# Altium PCB sitara_rev3b.PcbDoc (part 1 of 3)
Units mil, origin at the board's own origin, x right, y up, seen from the top; angles counter-clockwise.
Board outline 1650 x 2400 mil, 4 copper layers (Top Layer, Internal Plane 1, Internal Plane 2, Bottom Layer), stack 60.8 mil thick; 109 components, 83 nets, 387 pads, 306 vias.
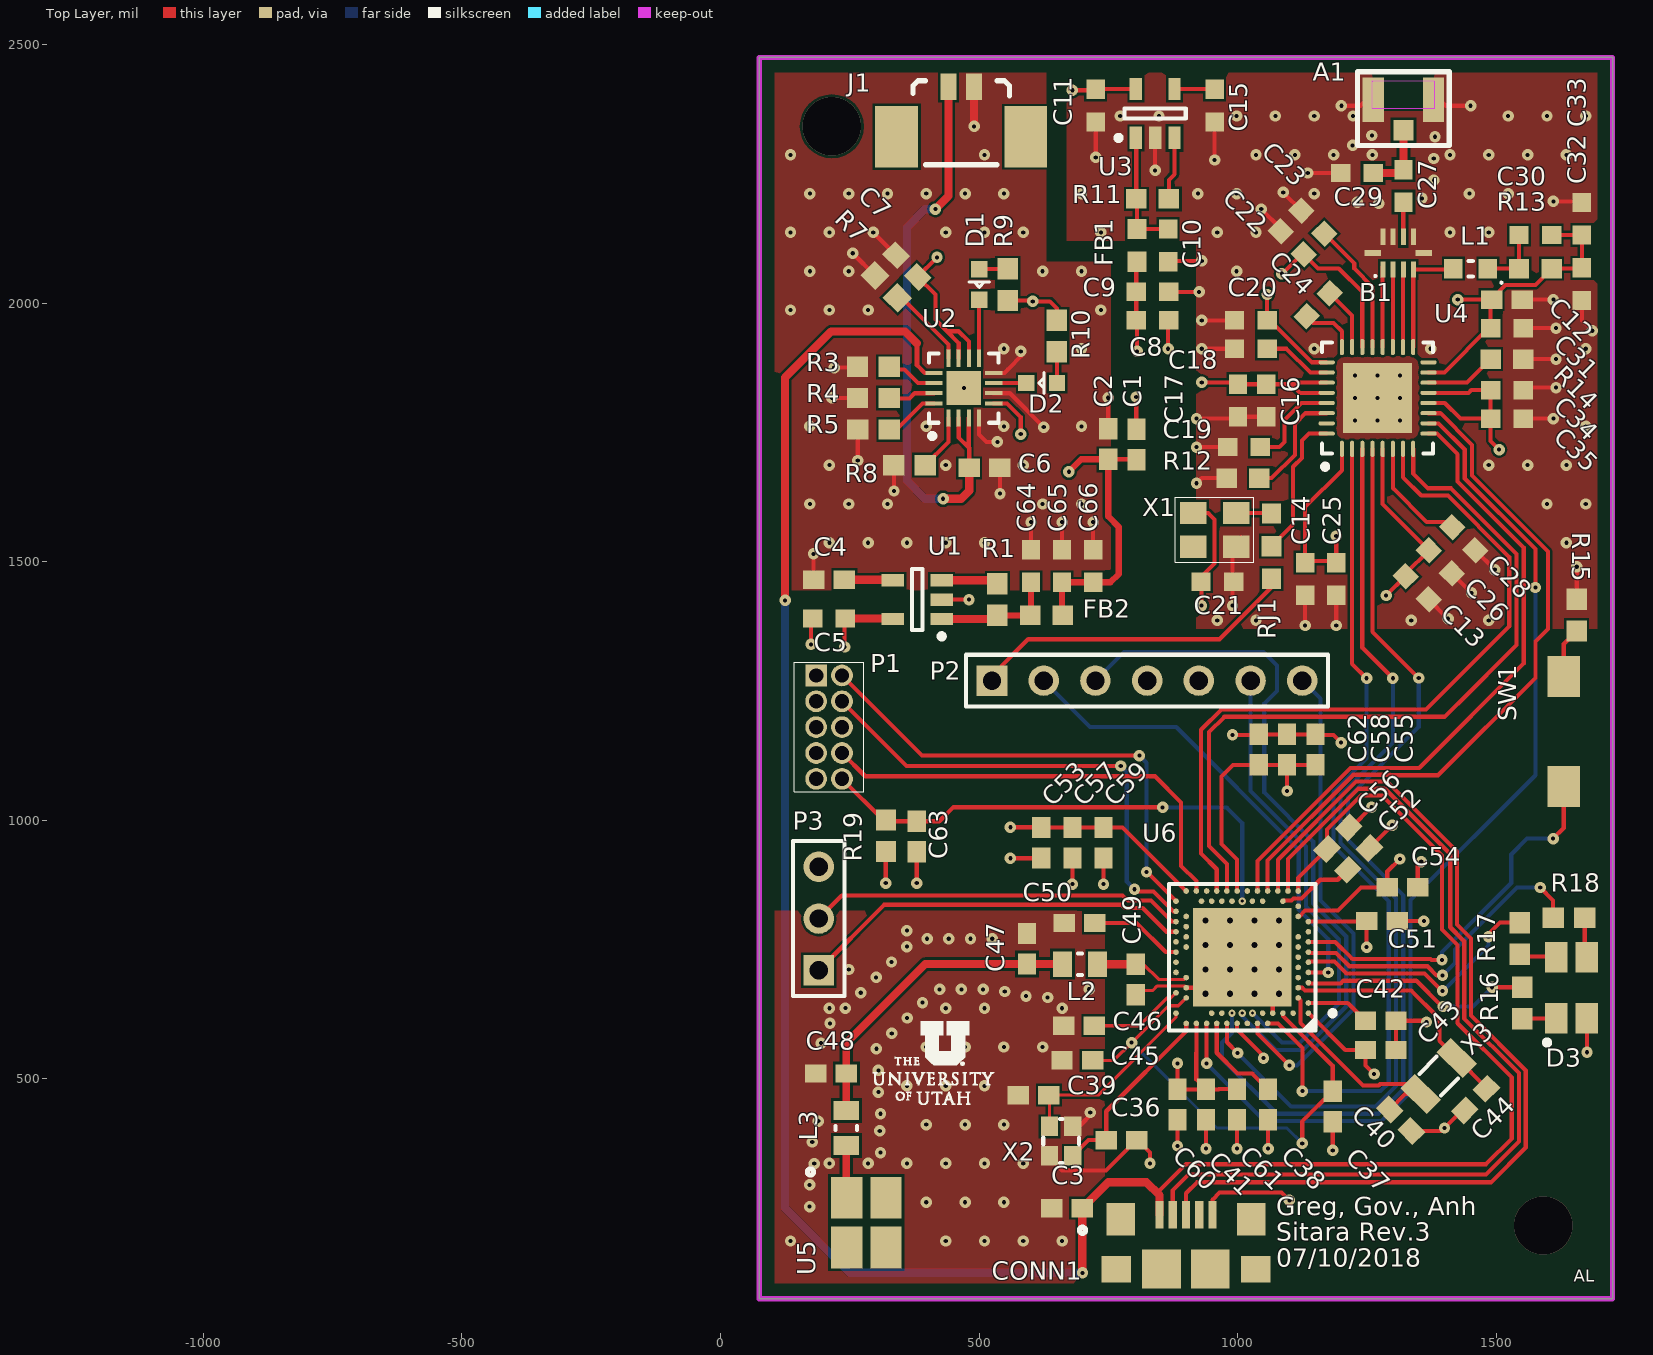
[diagram p0: Top Layer view]
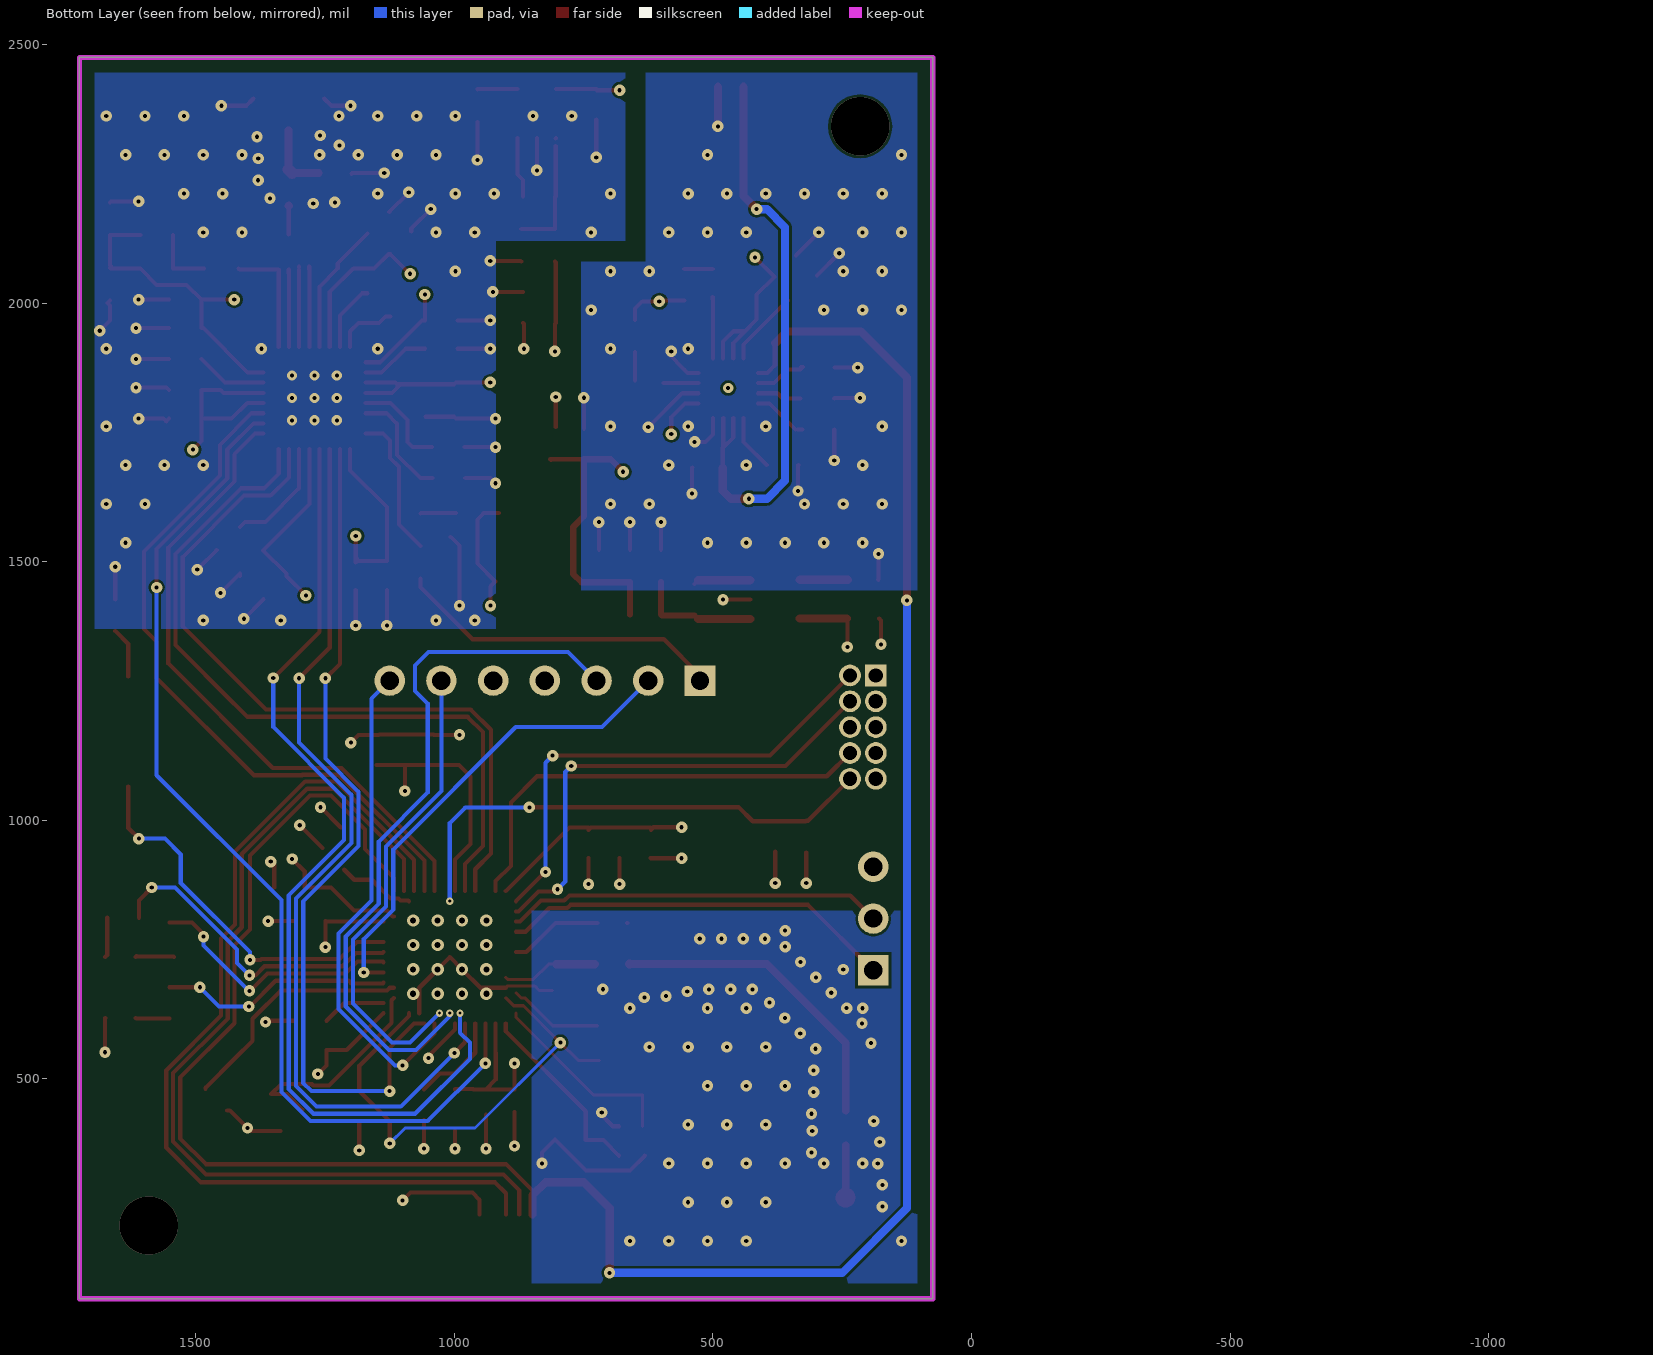
[diagram p1: Bottom Layer view, seen from below]
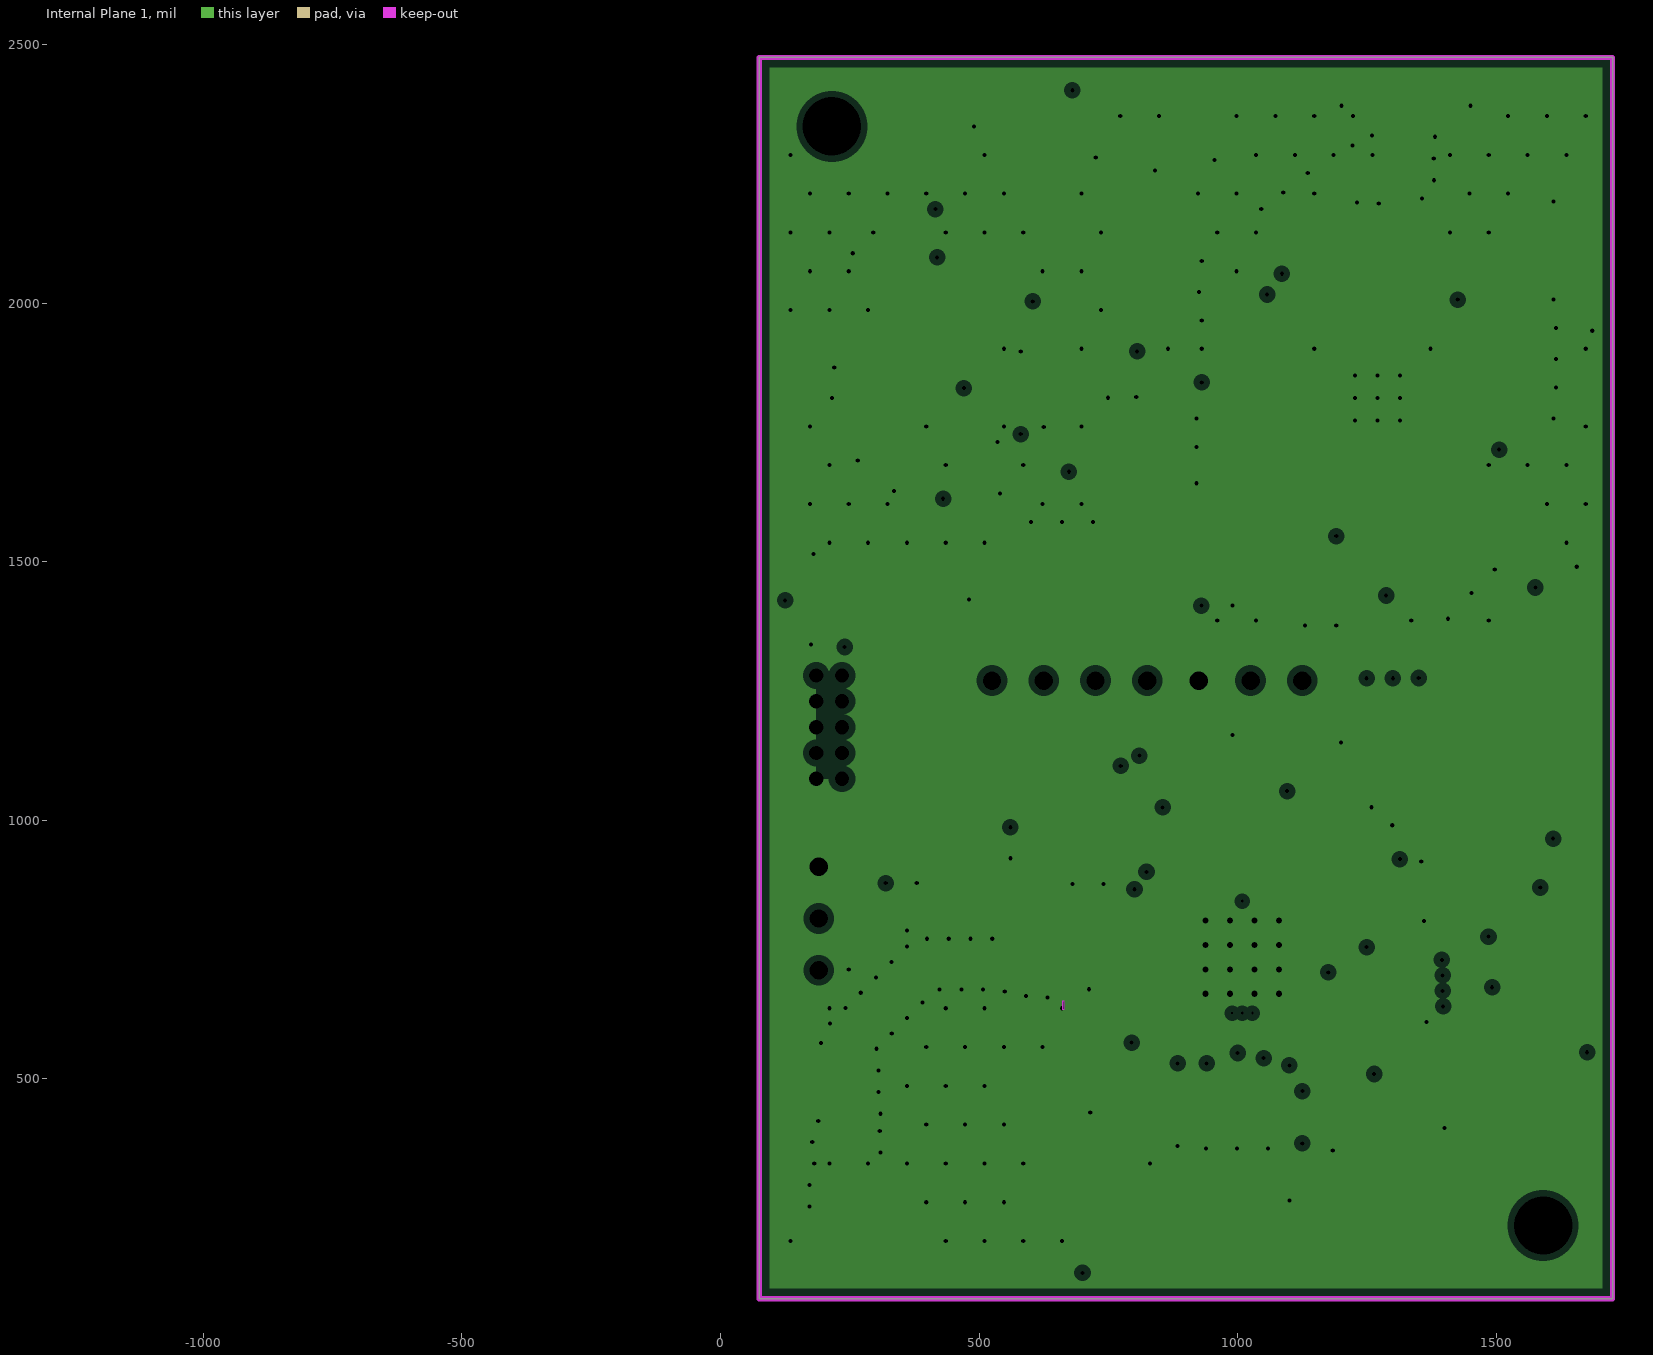
[diagram p2: Internal Plane 1, clearances drawn from the general rule]
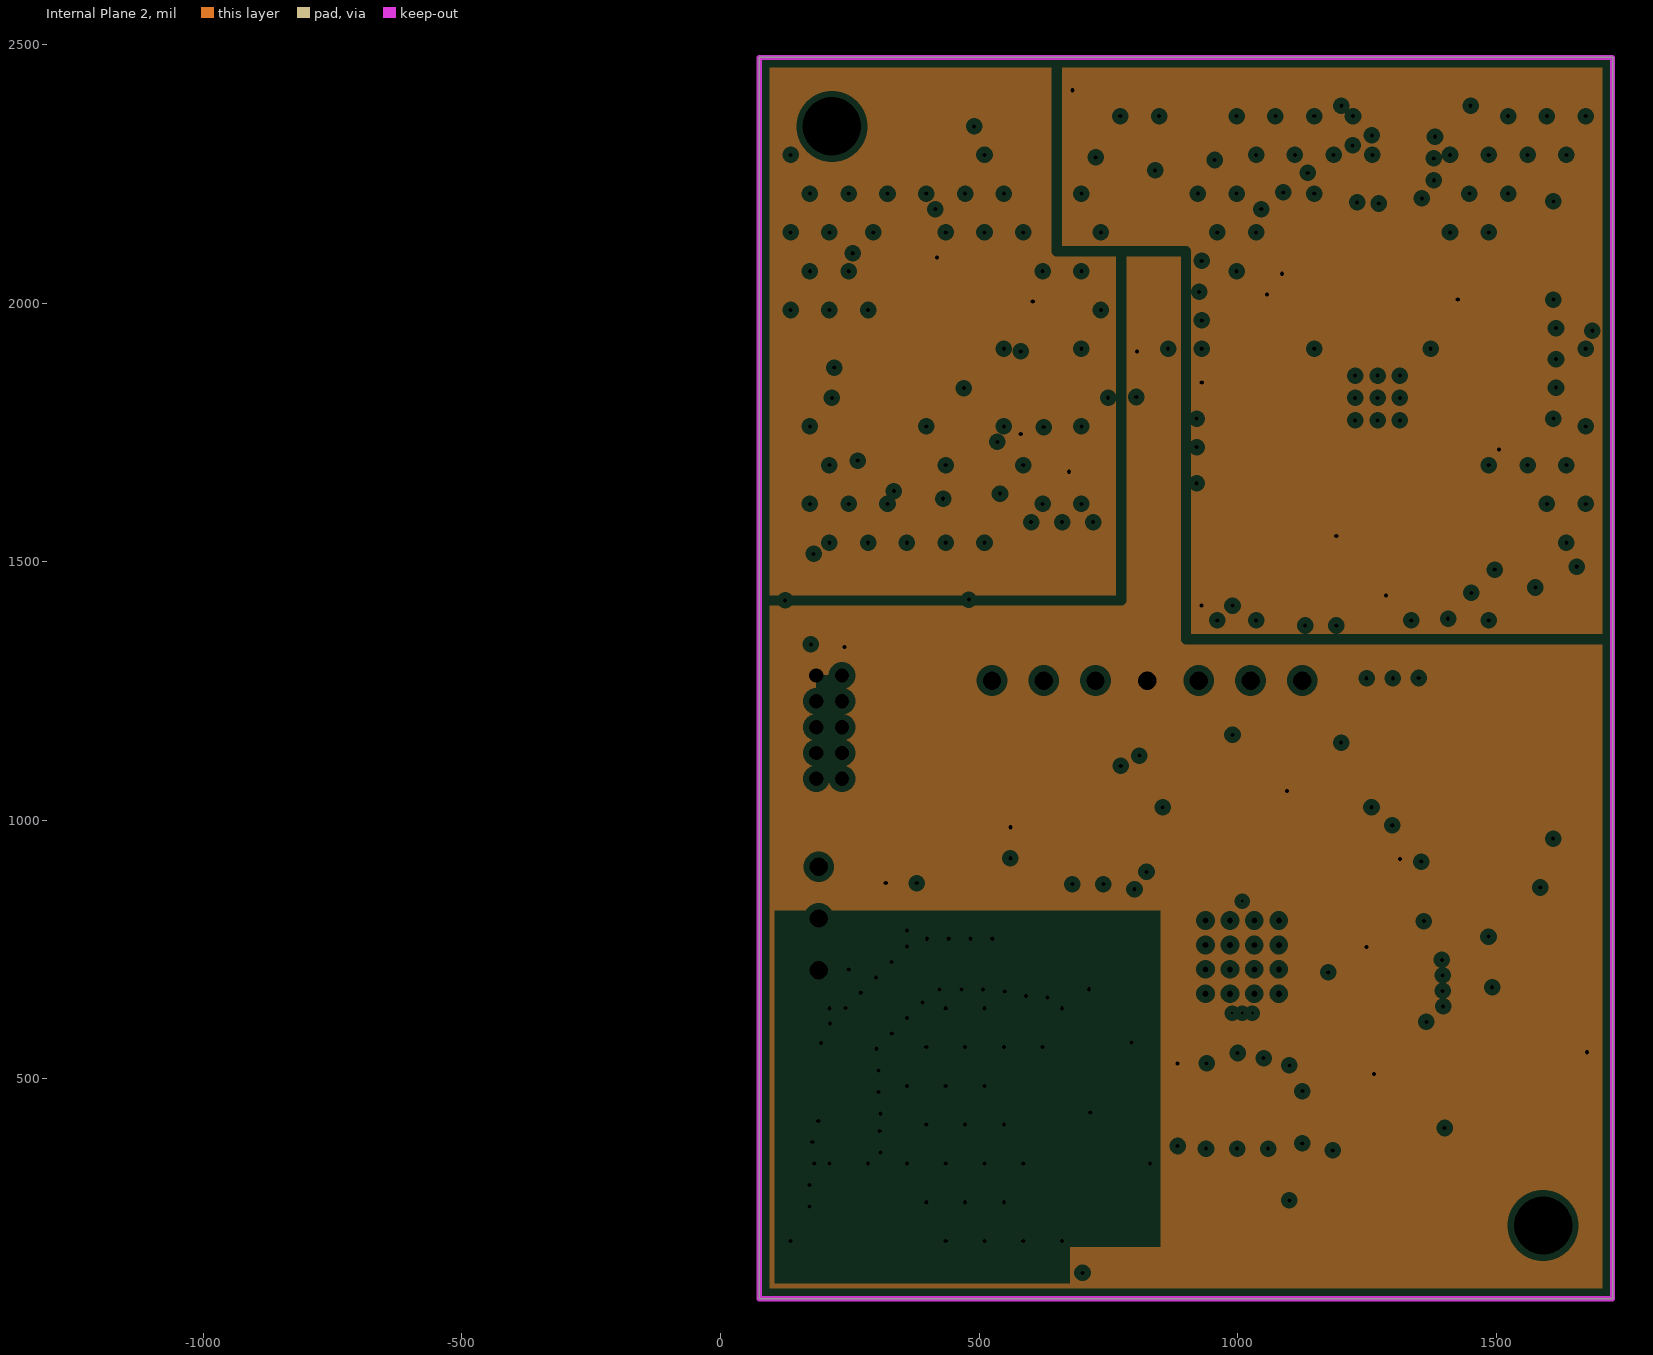
[diagram p3: Internal Plane 2, clearances drawn from the general rule]

## Layer stack, top to bottom
Top Solder: solder mask 0.6, Solder Resist, Dk 3.5
Top Layer: signal copper 1.4
Dielectric1: prepreg 9.1, ML 4, Dk 4.2
Internal Plane 1: plane copper 1.4, net GND
Dielectric2: prepreg 37, ML 4, Dk 4.2
Internal Plane 2: plane copper 1.4, net (Multiple Nets)
Dielectric3: prepreg 9.1, ML 4, Dk 4.2
Bottom Layer: signal copper 1.4
Bottom Solder: solder mask 0.6, Solder Resist, Dk 3.5

## Board outline
75,75 75,2475 1725,2475 1725,75

## Design rules (kind name [scope] priority, off if disabled: settings)
Clearance "Clearance~Sunstone Circuits" [All] p1: gap=5 ignorepadtopadclearanceinfootprint=FALSE except(0: Arc-Hole Track-Hole SMDPad-Hole THPad-Hole Via-Hole Fill-Hole Poly-Hole Region-Hole Text-Hole) // Sunstone Circuits Minimum Clearance Rule (MLB~4&6 Layer Designs)
Clearance [All] p2: gap=5 ignorepadtopadclearanceinfootprint=FALSE except(0: Arc-Hole Track-Hole SMDPad-Hole THPad-Hole Via-Hole Fill-Hole Poly-Hole Region-Hole Text-Hole)
HoleSize "HoleSize~Sunstone Circuits" [All] p1: absolutevalues=TRUE maxlimit=251 minlimit=8 maxpercent=80.000 minpercent=20.000 // Sunstone Circuits Hole Size Rule (MLB~4&6 Layer Designs)
HoleSize Testpoint [All] p2: absolutevalues=TRUE maxlimit=100 minlimit=1 maxpercent=80.000 minpercent=20.000
HoleSize TestPointUsage [All] p3: absolutevalues=TRUE maxlimit=100 minlimit=1 maxpercent=80.000 minpercent=20.000
HoleSize [All] p4: absolutevalues=TRUE maxlimit=100 minlimit=1 maxpercent=80.000 minpercent=20.000
MinimumAnnularRing "MinimumAnnularRing~Sunstone Circuits" [All] p1: minimumring=7 // Sunstone Circuits Minimum Annular Ring (MLB~4&6 Layer Designs)
PlaneClearance "PlaneClearance~Sunstone Circuits" [All] p1: clearance=12 // Sunstone Circuits Power Plane Clearance Rule (MLB~4&6 Layer Designs)
PlaneClearance [All] p2: clearance=20
PlaneConnect [All] p1: planeconnectstyle=Direct reliefexpansion=20 reliefentries=4 reliefconductorwidth=10 reliefairgap=10
PlaneConnect "PlaneConnect~Sunstone Circuits" [All] p2: planeconnectstyle=Relief reliefexpansion=10 reliefentries=4 reliefconductorwidth=8 reliefairgap=10 // Sunstone Circuits Power Plane Connect Rule (MLB~4&6 Layer Designs)
PolygonConnect Stitch [IsPolygon vs InNet('GND')] p1: connectstyle=Direct reliefconductorwidth=10 reliefentries=4 polygonreliefangle="90 Angle" airgapwidth=10
PolygonConnect "PolygonConnect~Sunstone Circuits" [All] p2: connectstyle=Relief reliefconductorwidth=8 reliefentries=4 polygonreliefangle="90 Angle" airgapwidth=10 // Sunstone Circuits Polygon Connect Style (MLB~4&6 Layer Designs)
PolygonConnect [All] p3: connectstyle=Relief reliefconductorwidth=10 reliefentries=4 polygonreliefangle="90 Angle" airgapwidth=10
RoutingVias "RoutingVias~Sunstone Circuits" [All] p1: holewidth=8 width=22 viastyle="Through Hole" minholewidth=8 minwidth=22 maxholewidth=20 maxwidth=40 // Sunstone Circuits Routing Vias Rule (MLB~4&6 Layer Designs)
RoutingVias [All] p2: holewidth=12 width=24 viastyle="Through Hole" minholewidth=5.91 minwidth=13.78 maxholewidth=12 maxwidth=24
ShortCircuit "ShortCircuit~Sunstone Circuits" [All] p1: allowed=FALSE // Sunstone Circuits Short Circuit Rule~Do Not Allow (MLB~4&6 Layer Designs)
ShortCircuit [All] p2: allowed=FALSE
SolderMaskExpansion "SolderMaskExpansion~Sunstone Circuits" [All] p1: expansion=3 // Sunstone Circuits Solder Mask Expansion Rule (MLB~4&6 Layer Designs)
SolderMaskExpansion [All] p2: expansion=4
ViasUnderSMD "ViasUnderSMD~Sunstone Circuits" [All] p1: allowed=FALSE // Sunstone Circuits Vias Under SMD~Do Not Allow (MLB~4&6 Layer Designs)
Width Antenna [InNetClass('RF')] p1: maxlimit=13.19 minlimit=13.19 preferedwidth=13.19 impedancedriven=TRUE minimp=50.000000 maximp=50.000000 favimp=50.000000
Width "Width~Sunstone Circuits" [All] p2: maxlimit=100 minlimit=6 preferedwidth=10 // Sunstone Circuits Minimum Width Rule (MLB~4&6 Layer Designs)
Width [All] p3: maxlimit=40 minlimit=4 preferedwidth=16 bottomlayer_minwidth=6 minimp=50.000000 maximp=50.000000 favimp=50.000000
26 further rules are at their usual default settings.

## Classes and differential pairs
component class U_BLE_USB_nRF52840: C36 C37 C38 C39 C40 C41 C42 C43 C44 C45 C46 C47 C48 C49 C50 C51 C52 C53 C54 C55 C56 C57 C58 C59 C60 C61 C62 C63 D3 L2 L3 P1 P3 R15 R16 R17 R18 R19 SW1 U5 U6 X2 X3
component class U_Power_System: C1 C2 C3 C4 C5 C6 C7 C64 C65 C66 CONN1 D1 D2 FB2 J1 R1 R3 R4 R5 R7 R8 R9 R10 U1 U2
component class U_RF: A1 B1 C8 C9 C10 C11 C12 C13 C14 C15 C16 C17 C18 C19 C20 C21 C22 C23 C24 C25 C26 C27 C28 C29 C30 C31 C32 C33 C34 C35 FB1 L1 P2 R11 R12 R13 R14 RJ1 U3 U4 X1
net class RF: NetA1_1 NetC47_2 NetL3_2

## Components (designator, comment, footprint, x,y, rotation, side; value= is the part's Value field where it differs from the comment)
A1 "U.FL-R-SMT(01)" U.FL-R-SMT-1 1320.5,2392.88 r0 top
B1 "0900PC15J0013" 0900PC15J0013 1310.5,2096.5 r90 top
C1 "4.7uF" 0603_Cap 804.39,1726.75 r270 top
C2 "0.1uF" 0603_Cap 749.64,1727.36 r270 top
C3 "1uF" 0603_Cap 670,250 r0 top
C4 "10uF" 0603_Cap 210,1465 r0 top
C5 "GRM188R61A105KA61D" "CAPC1608X08N (0603)" 210,1390 r0 top
C6 "4.7uF" 0603_Cap 510.5,1681.5 r180 top
C7 "4.7uF" 0603_Cap 360.5,2071.5 r315 top
C8 "GRM188R60J106ME47D" "CAPC1608X08N (0603)" 835.5,1966.5 r180 top
C9 "GRM188R61A105KA61D" "CAPC1608X08N (0603)" 835.5,2021.5 r180 top
C10 "GRM188F51A225ZE01D" "CAPC1608X08N (0603)" 865.5,2111.5 r90 top
C11 "GRM188R61A105KA61D" "CAPC1608X08N (0603)" 725.5,2381.5 r90 top
C12 "0.1uF" 0603_Cap 1520.5,2006.5 r180 top
C13 "GRM188R61A105KA61D" "CAPC1608X08N (0603)" 1346.97,1449.5 r135 top
C14 "GRM188R60J106ME47D" "CAPC1608X08N (0603)" 1130.5,1466.5 r90 top
C15 "GRM1885C1H102JA01D" "CAPC1608X08N (0603)" 955.5,2381.5 r90 top
C16 "GCM188R71H473KA55D" "CAPC1608X08N (0603)" 1055.5,1811.5 r270 top
C17 "GCM188R71H473KA55D" "CAPC1608X08N (0603)" 1000.5,1811.5 r270 top
C18 "GCM188R71H473KA55D" "CAPC1608X08N (0603)" 1025.5,1911.5 r0 top
C19 "GCM188R71H473KA55D" "CAPC1608X08N (0603)" 1012,1721.5 r180 top
C20 "GCM188R71H473KA55D" "CAPC1608X08N (0603)" 1025.5,1966.5 r0 top
C21 "GRM188R71H103MA01D" "CAPC1608X08N (0603)" 960.7,1461.3 r180 top
C22 "GCM188R71H473KA55D" "CAPC1608X08N (0603)" 1105.5,2116.5 r315 top
C23 "GRM188R71H103MA01D" "CAPC1608X08N (0603)" 1145.5,2156.5 r135 top
C24 "GRM1885C1H152JA01D" "CAPC1608X08N (0603)" 1155.5,1996.5 r225 top
C25 "GCM188R71H473KA55D" "CAPC1608X08N (0603)" 1190.5,1466.5 r90 top
C26 "GCM188R71H473KA55D" "CAPC1608X08N (0603)" 1391.97,1499.5 r135 top
C27 "C_TBD" "CAPC1608X08N (0603)" 1320.5,2226.5 r90 top value=DNP
C28 "GRM188R71E224KA88D" "CAPC1608X08N (0603)" 1436.97,1544.5 r135 top
C29 "C_TBD" "CAPC1608X08N (0603)" 1230.5,2251.5 r0 top value=DNP
C30 "GRM1885C1H330JA01D" "CAPC1608X08N (0603)" 1575.5,2131.5 r180 top value=33pF
C31 "GCM188R71H473KA55D" "CAPC1608X08N (0603)" 1520.5,1951.5 r0 top
C32 "GRM188R71H103MA01D" "CAPC1608X08N (0603)" 1665.5,2036.5 r90 top
C33 "GQM1885C1H101JB01D" "CAPC1608X08N (0603)" 1665.5,2163 r270 top
C34 "GCM188R71H473KA55D" "CAPC1608X08N (0603)" 1520.5,1831.5 r0 top
C35 "GCM188R71H473KA55D" "CAPC1608X08N (0603)" 1520.5,1776.5 r0 top
C36 "12pF" 0603_Cap 775.5,381.5 r0 top
C37 "1uF" 0603_Cap 1183.77,446.74 r90 top
C38 "0.1uF" 0603_Cap 1058.77,450.24 r270 top
C39 "12pF" 0603_Cap 605.5,468.59 r180 top
C40 "12pF" 0603_Cap 1315,420 r135 top
C41 "0.1uF" 0603_Cap 938.77,450.24 r90 top
C42 "0.1uF" 0603_Cap 1276.7,612.31 r180 top
C43 "1uF" 0603_Cap 1276.7,555.74 r180 top
C44 "12pF" 0603_Cap 1460,460 r45 top
C45 "100pF" 0603_Cap 690,535.69 r180 top
C46 "0.1uF" 0603_Cap 693.28,602.78 r0 top
C47 "0.5pF" 0603_Cap 592.65,751.5 r270 top
C48 "1.3pF" 0603_Cap 213.78,510.44 r0 top
C49 "0.8pF" 0603_Cap 803.1,692.3 r90 top
C50 "0.1uF" 0603_Cap 694.23,801.5 r180 top
C51 "4.7uF" 0603_Cap 1278.77,805.24 r180 top
C52 "4.7uF" 0603_Cap 1233.77,925.24 r225 top
C53 "0.1uF" 0603_Cap 620.5,956.5 r90 top
C54 "0.1uF" 0603_Cap 1318.77,870.24 r180 top
C55 "1uF" 0603_Cap 1150.5,1136.5 r270 top
C56 "4.7uF" 0603_Cap 1193.77,965.24 r225 top
C57 "10uF" 0603_Cap 680.5,956.5 r90 top
C58 "10uF" 0603_Cap 1095.5,1136.5 r270 top
C59 "1uF" 0603_Cap 740.5,956.5 r90 top
C60 "1uF" 0603_Cap 883.77,450.24 r90 top
C61 "0.1uF" 0603_Cap 998.77,450.24 r90 top
C62 "0.1uF" 0603_Cap 1040.5,1136.5 r270 top
C63 "0.1uF" 0603_Cap 379.5,968.5 r90 top
C64 "GRM188F51A225ZE01D" "CAPC1608X08N (0603)" 600.5,1491.5 r270 top
C65 "GRM188R60J106ME47D" "CAPC1608X08N (0603)" 660.5,1491.5 r270 top
C66 "GRM188R61A105KA61D" "CAPC1608X08N (0603)" 720.5,1491.5 r270 top
CONN1 "10118193-0001LF" USB_MICRO_B 900,185 r0 top
D1 "LTST-C191KFKT" 0603_LED 500.5,2065.48 r270 top
D2 "LTST-C191KFKT" 0603_LED 650.5,1845.48 r180 top
D3 "CLV1A-FKB-CJ1M1F1BB7R4S3" "CREE LV1" 1645.5,676.5 r90 top
FB1 "BLM18BD221SN1D" "RESC1608X06N (0603)" 805.5,2111.5 r90 top
FB2 "BLM18BD221SN1D" "RESC1608X06N (0603)" 630.5,1396.5 r180 top
J1 "0533980271" 53398-0271 465.5,2321.5 r0 top
L1 "LQG18HN10NJ00D" INDC1608X08N 1450.5,2066.5 r180 top value=10nH
L2 "3.3nH" 0603_IND 695.18,721.83 r180 top
L3 "1.8nH" 0603_IND 243.38,405 r270 top
P1 "M50-3500542" M50 210,1180 r270 top
P2 "Header 7" HDR1X7 525,1270 r0 top
P3 "Header 3" HDR1X3 190,710 r90 top
R1 "10K" 0603_RES 535.5,1426.5 r270 top
R3 "56.2K" 0603_RES 295.5,1876.5 r0 top
R4 "3.57K" 0603_RES 295.5,1816.5 r0 top
R5 "4.32K" 0603_RES 296.01,1755.48 r0 top
R7 "2.94K" 0603_RES 320.5,2031.5 r135 top
R8 "10K" 0603_RES 365.5,1686.5 r0 top
R9 "1.5K" 0603_RES 555.5,2035.48 r270 top
R10 "1.5K" 0603_RES 650.5,1936.5 r90 top
R11 "RC0603FR-0710KL" "RESC1608X06N (0603)" 835.5,2201.5 r180 top
R12 "MCR03ERTJ000" "RESC1608X06N (0603)" 1010.5,1661.5 r0 top
R13 "RC0603FR-0710RL" "RESC1608X06N (0603)" 1575.5,2066.5 r180 top value="10 ohm"
R14 "MCR03ERTJ563" "RESC1608X06N (0603)" 1520.5,1891.5 r180 top
R15 "3.57K" 0603_RES 1655.5,1396.5 r270 top
R16 "330" 0603_RES 1550.5,646.5 r270 top
R17 "330" 0603_RES 1545.5,771.5 r90 top
R18 "330" 0603_RES 1640.5,811.5 r180 top
R19 "10K" 0603_RES 320,970 r90 top
RJ1 "R_J" RJ 1065.5,1530 r90 top value=DNP
SW1 "EVQ-PE105K" EVQ-PE105K 1630.5,1171.5 r270 top
U1 "TPS2147IDGQG4" SOT95P280X145-5N 380.5,1426.5 r180 top
U2 "BQ24232HARGTT" QFN_16_BQ24232 470.5,1835.48 r90 top
U3 "FAN2500S30X" SOT95P280X145-5N 840.5,2366.5 r90 top
U4 "CC1200RHBR" S-PVQFN-N32 1270.5,1816.5 r90 top
U5 "2.4GHz" ANT_molex_2_4_GHz 244.02,270 r0 top
U6 "nRF52840-QIAA" AQFN50P700X700X85_HS-74N 1008.77,735.24 r180 top
X1 "ASE-40.000MHZ-L-C-T" 3.2x2.5x1.2mmXTAL 955.5,1561.5 r0 top
X2 "32MHz" BT-XTAL_2016 658.77,379.79 r270 top
X3 "32.768kHz" XTAL_3215 1388.77,505.24 r45 top

## Footprints (in the part's own frame and the unit in brackets; to place one, negate y for a bottom-side part, rotate by r counter-clockwise, add the part's x,y. Pads: shape width x height; smd on the part's side, far side on the other; paste and mask are expansions set on the pad)
3.2x2.5x1.2mmXTAL [mm]
  rect 1.3x1.1 smd: 1(-1.05,-0.825) 2(1.05,-0.825) 3(1.05,0.825) 4(-1.05,0.825)
  round 0.5 on Top Overlay: 5(-2.25,-1.25)
  silkscreen extent -1.92,-1.6 1.92,1.6, body extent -1.6,-1.25 1.6,1.25, height 0.91
0603_Cap [mm] "Chip Capacitor, 2-Leads, Body 1.60x0.80mm, IPC Medium Density"
  rect 1.05x0.9 smd: 1(-0.75,0) 2(0.75,0)
  body extent -0.85,-0.45 0.85,0.45, height 0.9
0603_IND [mm] "Chip Inductor, 2-Leads, Body 1.60x1.05mm, IPC Medium Density"
  rect 0.93x1.25 smd: 1(-0.86,0) 2(0.86,0)
  silkscreen extent -0.1,-0.53 0.1,0.53, body extent -0.9,-0.63 0.9,0.63, height 1.25
0603_LED [mm]
  rect 0.8x0.8 smd: 1(0,0) 2(1.5,0)
  silkscreen extent 0.63,-0.51 0.89,0.51
0603_RES [mm] "Chip Resistor, 2-Leads, Body 1.55x0.80mm, IPC Medium Density"
  rect 1.05x1 smd: 1(-0.775,0) 2(0.775,0)
  body extent -0.85,-0.48 0.85,0.47, height 0.55
0900PC15J0013 [mm]
  rect 0.8x0.25 smd: 1(-0.8,0.75) 2(-0.8,0.25) 3(-0.8,-0.25) 4(-0.8,-0.75) 6(0.8,-0.75) 7(0.8,-0.25) 8(0.8,0.25) 9(0.8,0.75)
  rect 0.3x0.8 smd: 5(0,-1.25) 10(0,1.25)
  silkscreen extent -1.17,1.07 -1.08,1.17, body extent -0.72,-1.1 0.72,1.1, height 1
53398-0271 [mm] "1.25mm Pitch PicoBlade™ Header, Surface Mount, Vertical, Lead-Free, 2 Circuits"
  rect 0.8x1.3 smd: 1(-0.625,2.45) 2(0.625,2.45)
  rect 2.1x3 smd: 3(-3.175,0) 4(3.175,0)
  silkscreen extent -2.37,-1.38 2.37,2.75, body extent -3.83,-1.33 3.82,2.87, height 4.7
ANT_molex_2_4_GHz [mm] "molex antenna footprint"
  rect 1.54x2.04 smd: 1(0,0) 2(1.93,0) 3(1.93,-2.44) 4(0,-2.44)
  silkscreen extent -1.93,1.12 -1.63,1.42
AQFN50P700X700X85_HS-74N [mm]
  rect 4.85x4.85 smd mask+0.05: 74(0,0)
  round 0.275 smd paste+0.012 mask+0.05: A8(-1.25,3.25) A10(-0.75,3.25) A12(-0.25,3.25) A14(0.25,3.25) A16(0.75,3.25) A18(1.25,3.25) A20(1.75,3.25) A22(2.25,3.25) A23(2.75,3.25) AA24(3.25,-2.25) AB2(-2.75,-2.5) AC5(-2,-2.75) AC9(-1,-2.75) AC11(-0.5,-2.75) AC13(0,-2.75) AC15(0.5,-2.75) AC17(1,-2.75) AC19(1.5,-2.75) AC21(2,-2.75) AC24(3.25,-2.75) AD2(-2.75,-3.25) AD4(-2.25,-3.25) AD6(-1.75,-3.25) AD8(-1.25,-3.25) AD10(-0.75,-3.25) AD12(-0.25,-3.25) AD14(0.25,-3.25) AD16(0.75,-3.25) AD18(1.25,-3.25) AD20(1.75,-3.25) AD22(2.25,-3.25) AD23(2.75,-3.25) B1(-3.25,2.75) B3(-2.5,2.75) B5(-2,2.75) B7(-1.5,2.75) B9(-1,2.75) B11(-0.5,2.75) B13(0,2.75) B15(0.5,2.75) B17(1,2.75) B19(1.5,2.75) B24(3.25,2.75) C1(-3.25,2.25) D2(-2.75,2) D23(2.75,2) E24(3.25,1.75) F2(-2.75,1.5) F23(2.75,1.5) G1(-3.25,1.25) H2(-2.75,1) H23(2.75,1) J1(-3.25,0.75) J24(3.25,0.75) K2(-2.75,0.5) L1(-3.25,0.25) L24(3.25,0.25) M2(-2.75,0) N1(-3.25,-0.25) N24(3.25,-0.25) P2(-2.75,-0.5) P23(2.75,-0.5) R1(-3.25,-0.75) R24(3.25,-0.75) T2(-2.75,-1) T23(2.75,-1) U1(-3.25,-1.25) U24(3.25,-1.25) V23(2.75,-1.5) W1(-3.25,-1.75) W24(3.25,-1.75) Y2(-2.75,-2) Y23(2.75,-2)
  silkscreen extent -4.57,-3.6 3.6,3.6, body extent -3.55,-3.55 3.55,3.55, height 0.85
BT-XTAL_2016 [mm]
  rect 0.95x0.85 smd: 1(-0.725,-0.575) 2(0.725,-0.575) 3(0.725,0.575) 4(-0.725,0.575)
  silkscreen extent -1.08,-0.88 1.08,0.88
"CAPC1608X08N (0603)" [mm] "Chip Capacitor, 2-Leads, Body 1.60x0.80mm, IPC Medium Density"
  rect 0.95x0.9 smd: 1(-0.8,0) 2(0.8,0)
  body extent -0.85,-0.45 0.85,0.45, height 0.8
"CREE LV1" [mm]
  rect 1.5x1.1 smd: 1(-1.5,0.75) 2(-1.5,-0.75) 3(1.5,-0.75) 4(1.5,0.75)
  silkscreen extent -2.82,1.07 -2.58,1.32, body extent -1.75,-1.4 1.75,1.4, height 1.9
EVQ-PE105K [mm]
  rect 2x1.6 smd: 1(-2.7,0) 2(2.7,0)
  body extent -3.6,-1.75 3.6,1.75, height 5
HDR1X3 [mm] "Connector; Header; 3 Position"
  rect 1.5x1.5 hole 0.9: 1(0,0)
  round 1.5 hole 0.9: 2(2.54,0) 3(5.08,0)
  silkscreen extent -1.27,-1.27 6.35,1.27
HDR1X7 [mm] "Connector; Header; 7 Position"
  rect 1.5x1.5 hole 0.9: 1(0,0)
  round 1.5 hole 0.9: 2(2.54,0) 3(5.08,0) 4(7.62,0) 5(10.16,0) 6(12.7,0) 7(15.24,0)
  silkscreen extent -1.27,-1.27 16.51,1.27
INDC1608X08N [mm] "Chip Inductor, 2-Leads, Body 1.60x0.80mm, IPC Medium Density"
  rect 0.91x0.96 smd: 1(-0.845,0) 2(0.845,0)
  silkscreen extent -1.56,-0.38 0.1,0.74, body extent -0.87,-0.48 0.87,0.47, height 0.8
M50 [mil]
  rect 42x42 hole 27.56: 1(-100,-25)
  round 42 hole 27.56: 2(-100,25) 3(-50,-25) 4(-50,25) 5(0,-25) 6(0,25) 7(50,-25) 8(50,25) 9(100,-25) 10(100,25)
  silkscreen extent -125,-67 125,67, body extent -125,-67 125,67, height 157
QFN_16_BQ24232 [mm] "QFN, 16-Leads, Body 3.00x3.00mm, Pitch 0.50mm, Thermal Pad 1.68x1.68mm, IPC Medium Density"
  rect 0.85x0.2 smd: 1(-1.465,0.75) 2(-1.465,0.25) 3(-1.465,-0.25) 4(-1.465,-0.75) 9(1.465,-0.75) 10(1.465,-0.25) 11(1.465,0.25) 12(1.465,0.75)
  rect 0.2x0.85 smd: 5(-0.75,-1.465) 6(-0.25,-1.465) 7(0.25,-1.465) 8(0.75,-1.465) 13(0.75,1.465) 14(0.25,1.465) 15(-0.25,1.465) 16(-0.75,1.465)
  rect 1.68x1.68 smd: 17(0,0)
  silkscreen extent -2.47,-1.7 1.7,1.7, body extent -1.55,-1.55 1.55,1.55, height 1
"RESC1608X06N (0603)" [mm] "Chip Resistor, 2-Leads, Body 1.60x0.80mm, IPC Medium Density"
  rect 1x0.95 smd: 1(-0.8,0) 2(0.8,0)
  body extent -0.85,-0.45 0.85,0.45, height 0.55
RJ [mm] "0 Ohm Resistor Jumper"
  rect 1x0.95 smd: 1(-1.6,0) 3(1.6,0)
  rect 1x1 smd: 2(0,0)
  round 0.5 on Top Overlay: 5(-2.475,-0.825)
  body extent -1.35,-0.45 1.65,0.45, height 0.55
S-PVQFN-N32 [mm] "QFN, 32-Leads, Body 5.00x5.00mm, Pitch 0.50mm, Thermal Pad 3.45x3.40mm, IPC Medium Density"
  oval 0.8x0.2 smd: 1(-2.5,1.75) 2(-2.5,1.25) 3(-2.5,0.75) 4(-2.5,0.25) 5(-2.5,-0.25) 6(-2.5,-0.75) 7(-2.5,-1.25) 8(-2.5,-1.75) 17(2.5,-1.75) 18(2.5,-1.25) 19(2.5,-0.75) 20(2.5,-0.25) 21(2.5,0.25) 22(2.5,0.75) 23(2.5,1.25) 24(2.5,1.75)
  oval 0.2x0.8 smd: 9(-1.75,-2.5) 10(-1.25,-2.5) 11(-0.75,-2.5) 12(-0.25,-2.5) 13(0.25,-2.5) 14(0.75,-2.5) 15(1.25,-2.5) 16(1.75,-2.5) 25(1.75,2.5) 26(1.25,2.5) 27(0.75,2.5) 28(0.25,2.5) 29(-0.25,2.5) 30(-0.75,2.5) 31(-1.25,2.5) 32(-1.75,2.5)
  rect 3.45x3.4 smd: 33(0,0)
  silkscreen extent -3.5,-2.73 2.73,2.73, body extent -2.58,-2.57 2.57,2.58, height 1
SOT95P280X145-5N [mm] "SOT23, 5-Leads, Body 2.90x2.80mm, Pitch 0.95mm, IPC Medium Density"
  rect 1.1x0.6 smd: 1(-1.2,0.95) 2(-1.2,0) 3(-1.2,-0.95) 4(1.2,-0.95) 5(1.2,0.95)
  silkscreen extent -1.33,-1.5 0.25,1.92, body extent -0.85,-1.5 0.85,1.5, height 1.45
U.FL-R-SMT-1 [mm] "U.FL-R-SMT-1"
  rect 1x1 smd: 1(0,-1.5)
  rect 1.05x2.2 smd: 2(-1.475,0) 3(1.475,0)
  silkscreen extent -2.25,-2.25 2.25,1.38, body extent -1.5,-1.55 1.5,1.55, height 1.26
USB_MICRO_B [mm] "USB_Micro_B_A97800CT-ND"
  rect 1.45x1.3 smd: 0(-3.425,-1.338) 0(3.425,-1.338)
  rect 1.4x1.6 smd: 0(-3.2,1.112) 0(3.2,1.112)
  rect 1.9x1.9 smd: 0(-1.2,-1.338) 0(1.2,-1.338)
  rect 0.4x1.35 smd: 1(-1.3,1.338) 2(-0.65,1.338) 3(0,1.338) 4(0.65,1.338) 5(1.3,1.338)
  silkscreen extent -5.23,0.42 -4.93,0.72, body extent -3.99,-3.93 3.99,1.5, height 2.72
XTAL_3215 [mm]
  rect 1x1.8 smd: 1(-1.25,0) 2(1.25,0)
  silkscreen extent -0.6,-0.75 0.6,0.75, body extent -1.6,-0.75 1.6,0.75, height 0.81

## Part data
A1: "CONN UMC JACK STR 50 OHM SMD", Dielectric Material="Liquid Crystal Polymer (LCP)", Frequency - Max=6GHz, Housing Color=Silver, Manufacturer="Hirose Electric Co Ltd", Operating Temperature="-40°C ~ 90°C", Voltage Rating=-, Body Finish=Silver, Body Material="Phosphor Bronze", Cable Group=-, Category="Connectors, Interconnects", Center Contact Material="Phosphor Bronze", Center Contact Plating=Gold, ComponentLink1Description=http://www.hirose.co.jp/cataloge_hp/e32119372.pdf, ComponentLink1URL=http://www.hirose.co.jp/cataloge_hp/e32119372.pdf, Connector Style="Ultra Miniature Coaxial", Connector Type="Jack, Male Pin", Contact Termination=Solder, Fastening Type=Snap-On, Features=-, Impedance="50 Ohm", Ingress Protection=-, Manufacturer Part Number=U.FL-R-SMT(01), Mounting Type="Surface Mount", Packaging=Bulk, Pricing 1="1=1.28, 10=1.122, 25=1.056, 50=1.012, 100=0.968, 250=0.88, 500=0.792, 1000=0.704, 2500=0.638 (USD)", RoHS="RoHS Compliant", Shield Termination=Solder, Stock 1=22286, Supplier 1=Digi-Key
B1: "TI CC1120 1121 BALUN FILTER IPC", Frequency Range="868MHz ~ 928MHz", Manufacturer="Johanson Technology Inc.", Package / Case="0805 (2012 Metric), 10 PC Pad", Supplier Part Number 1=712-1586-1-ND, Category="RF/IF and RFID", ComponentLink1Description=http://www.johansontechnology.com/datasheets/highly-integrated-passive-components/0900PC15J0013.pdf, ComponentLink1URL=http://www.johansontechnology.com/datasheets/highly-integrated-passive-components/0900PC15J0013.pdf, Impedance - Unbalanced/Balanced="50 / 50 Ohm", Insertion Loss (Max)=2.0dB, Manufacturer Part Number=0900PC15J0013, Mounting Type="Surface Mount", Packaging="Cut Tape (CT)", Part Status=Active, Phase Difference="180° ±15", Pricing 1="1=1.6, 10=1.563, 25=1.0464, 50=0.9314, 100=0.8533, 250=0.7656, 500=0.74966, 1000=0.5423 (USD)", Return Loss (Min)=9.5dB, RoHS="RoHS Compliant", Stock 1=6483, Supplier 1=Digi-Key
C1 C6 C7 C51 C52 C56: library part JMK107BJ475MAHT, Capacitance=4.7µF, Manufacturer="Taiyo Yuden", Operating Temperature="-55°C ~ 85°C", Package / Case="0603 (1608 Metric)", Ratings=AEC-Q200, Supplier Part Number 1=587-4903-2-ND, Temperature Coefficient=X5R, Tolerance=±20%, Voltage - Rated=6.3V, Applications="Automotive, SMPS Filtering", Category=Capacitors, ComponentLink1Description=http://www.yuden.co.jp/productdata/catalog/en/mlcc_all_hq_e.pdf, ComponentLink1URL=http://www.yuden.co.jp/productdata/catalog/en/mlcc_all_hq_e.pdf, Failure Rate=-, Features=-, Height - Seated (Max)=-, Lead Spacing=-, Lead Style=-, Manufacturer Part Number=JMK107BJ475MAHT, Mounting Type="Surface Mount, MLCC", Packaging="Tape & Reel (TR)", Part Status=Active, Pricing 1="4000=0.03053, 8000=0.0284, 12000=0.02698, 28000=0.02556, 100000=0.01935 (USD)", RoHS="RoHS Compliant", Size / Dimension="0.063\" L x 0.031\" W (1.60mm x 0.80mm)", Stock 1=4000, Supplier 1=Digi-Key, Thickness (Max)="0.035\" (0.90mm)"
C2 C12 C38 C41 C42 C46 C50 C53 C54 C61 C62 C63: library part 0603YC104KAT4A, "CAP CER 0.1UF 16V X7R 0603", Capacitance=0.1µF, Manufacturer="AVX Corporation", Operating Temperature="-55°C ~ 125°C", Package / Case="0603 (1608 Metric)", Ratings=-, Supplier Part Number 1=478-10054-2-ND, Temperature Coefficient=X7R, Tolerance=±10%, Voltage - Rated=16V, Applications="General Purpose", Category=Capacitors, ComponentLink1Description=http://datasheets.avx.com/X7RDielectric.pdf, ComponentLink1URL=http://datasheets.avx.com/X7RDielectric.pdf, Failure Rate=-, Features=-, Height - Seated (Max)=-, Lead Spacing=-, Lead Style=-, Manufacturer Part Number=0603YC104KAT4A, Mounting Type="Surface Mount, MLCC", Packaging="Tape & Reel (TR)", Part Status=Active, Pricing 1="15000=0.00344, 30000=0.00327, 75000=0.00292, 105000=0.00237 (USD)", RoHS="RoHS Compliant", Size / Dimension="0.063\" L x 0.032\" W (1.60mm x 0.81mm)", Stock 1=15000, Supplier 1=Digi-Key, Thickness (Max)="0.035\" (0.90mm)"
C3 C37 C43 C55 C59 C60: library part JMK107C6105KA-T, "CAP CER 1uF SMD", Capacitance=1µF, Manufacturer="Taiyo Yuden", Operating Temperature="-55°C ~ 105°C", Package / Case="0603 (1608 Metric)", Ratings=-, Supplier Part Number 1=587-4904-2-ND, Temperature Coefficient=X6S, Tolerance=±10%, Voltage - Rated=6.3V, Applications="SMPS Filtering", Category=Capacitors, ComponentLink1Description=http://www.yuden.co.jp/productdata/catalog/en/mlcc_all_e.pdf, ComponentLink1URL=http://www.yuden.co.jp/productdata/catalog/en/mlcc_all_e.pdf, Failure Rate=-, Features=-, Height - Seated (Max)=-, Lead Spacing=-, Lead Style=-, Manufacturer Part Number=JMK107C6105KA-T, Mounting Type="Surface Mount, MLCC", Packaging="Tape & Reel (TR)", Part Status=Active, Pricing 1="4000=0.02281, 8000=0.02122, 12000=0.02016, 28000=0.0191, 100000=0.01446 (USD)", RoHS="RoHS Compliant", Size / Dimension="0.063\" L x 0.031\" W (1.60mm x 0.80mm)", Stock 1=8000, Supplier 1=Digi-Key, Thickness (Max)="0.035\" (0.90mm)"
C4: library part GRM1885C1H102JA01D, "CAP CER 1000PF 50V 5% NP0 0603", Capacitance=1000pF, Manufacturer="Murata Electronics North America", Operating Temperature="-55°C ~ 125°C", Package / Case="0603 (1608 Metric)", Ratings=-, Temperature Coefficient="C0G, NP0", Tolerance=±5%, Voltage - Rated=50V, Applications="General Purpose", Category=Capacitors, ComponentLink1Description=http://www.murata.com/products/catalog/pdf/c02e.pdf, ComponentLink1URL=http://www.murata.com/products/catalog/pdf/c02e.pdf, Features=-, Height - Seated (Max)=-, Lead Spacing=-, Lead Style=-, Manufacturer Part Number=GRM1885C1H102JA01D, Mounting Type="Surface Mount, MLCC", Packaging="Tape & Reel (TR)", Pricing 1="4000=0.00863, 8000=0.00788, 12000=0.0075, 28000=0.00713, 100000=0.00516 (USD)", RoHS="RoHS Compliant", Size / Dimension="0.063\" L x 0.031\" W (1.60mm x 0.80mm)", Stock 1=140000, Supplier 1=Digi-Key, Thickness (Max)="0.035\" (0.90mm)"
C5 C9 C11 C13 C66: "CAP CER 1UF 10V 10% X5R 0603", Capacitance=1.0µF, Manufacturer="Murata Electronics North America", Operating Temperature="-55°C ~ 85°C", Package / Case="0603 (1608 Metric)", Ratings=-, Temperature Coefficient=X5R, Tolerance=±10%, Voltage - Rated=10V, Applications="General Purpose", Category=Capacitors, ComponentLink1Description=http://search.murata.co.jp/Ceramy/image/img/A01X/G101/ENG/GRM188R61A105KA61-01.pdf, ComponentLink1URL=http://search.murata.co.jp/Ceramy/image/img/A01X/G101/ENG/GRM188R61A105KA61-01.pdf, Features=-, Height - Seated (Max)=-, Lead Spacing=-, Lead Style=-, Manufacturer Part Number=GRM188R61A105KA61D, Mounting Type="Surface Mount, MLCC", Packaging="Cut Tape (CT)", Pricing 1="1=0.1, 10=0.041, 50=0.0224, 100=0.019, 250=0.01552, 500=0.01328, 1000=0.01035 (USD)", RoHS="RoHS Compliant", Size / Dimension="0.063\" L x 0.031\" W (1.60mm x 0.80mm)", Stock 1=244919, Supplier 1=Digi-Key, Thickness (Max)="0.035\" (0.90mm)"
C8 C14 C65: "CAP CER 10UF 6.3V 20% X5R 0603", Capacitance=10µF, Manufacturer="Murata Electronics North America", Operating Temperature="-55°C ~ 85°C", Package / Case="0603 (1608 Metric)", Ratings=-, Temperature Coefficient=X5R, Tolerance=±20%, Voltage - Rated=6.3V, Applications="General Purpose", Category=Capacitors, ComponentLink1Description=http://search.murata.co.jp/Ceramy/image/img/A01X/G101/ENG/GRM188R60J106ME47-01.pdf, ComponentLink1URL=http://search.murata.co.jp/Ceramy/image/img/A01X/G101/ENG/GRM188R60J106ME47-01.pdf, Features=-, Height - Seated (Max)=-, Lead Spacing=-, Lead Style=-, Manufacturer Part Number=GRM188R60J106ME47D, Mounting Type="Surface Mount, MLCC", Packaging=Digi-Reel®, Pricing 1="1=0.24, 10=0.2, 50=0.1126, 100=0.1, 250=0.075, 500=0.06626, 1000=0.05875 (USD)", RoHS="RoHS Compliant", Size / Dimension="0.063\" L x 0.031\" W (1.60mm x 0.80mm)", Stock 1=2128324, Supplier 1=Digi-Key, Supplier 2=Digi-Key, Thickness (Max)="0.035\" (0.90mm)"
C10 C64: "CAP CER 2.2UF 10V Y5V 0603", Capacitance=2.2µF, Manufacturer="Murata Electronics North America", Operating Temperature="-30°C ~ 85°C", Package / Case="0603 (1608 Metric)", Ratings=-, Temperature Coefficient="Y5V (F)", Tolerance="-20%, +80%", Voltage - Rated=10V, Applications="General Purpose", Category=Capacitors, ComponentLink1Description=http://search.murata.co.jp/Ceramy/image/img/A01X/G101/ENG/GRM188F51A225ZE01-01.pdf, ComponentLink1URL=http://search.murata.co.jp/Ceramy/image/img/A01X/G101/ENG/GRM188F51A225ZE01-01.pdf, Features=-, Height - Seated (Max)=-, Lead Spacing=-, Lead Style=-, Manufacturer Part Number=GRM188F51A225ZE01D, Mounting Type="Surface Mount, MLCC", Packaging="Tape & Reel (TR)", Pricing 1="4000=0.02043, 8000=0.019, 12000=0.01805, 28000=0.0171 (USD)", RoHS="RoHS Compliant", Size / Dimension="0.063\" L x 0.031\" W (1.60mm x 0.80mm)", Stock 1=8000, Supplier 1=Digi-Key, Thickness (Max)="0.035\" (0.90mm)"
C15: "CAP CER 1000PF 50V 5% NP0 0603", Capacitance=1000pF, Manufacturer="Murata Electronics North America", Operating Temperature="-55°C ~ 125°C", Package / Case="0603 (1608 Metric)", Ratings=-, Temperature Coefficient="C0G, NP0", Tolerance=±5%, Voltage - Rated=50V, Applications="General Purpose", Category=Capacitors, ComponentLink1Description=http://www.murata.com/products/catalog/pdf/c02e.pdf, ComponentLink1URL=http://www.murata.com/products/catalog/pdf/c02e.pdf, Features=-, Height - Seated (Max)=-, Lead Spacing=-, Lead Style=-, Manufacturer Part Number=GRM1885C1H102JA01D, Mounting Type="Surface Mount, MLCC", Packaging="Tape & Reel (TR)", Pricing 1="4000=0.00863, 8000=0.00788, 12000=0.0075, 28000=0.00713, 100000=0.00516 (USD)", RoHS="RoHS Compliant", Size / Dimension="0.063\" L x 0.031\" W (1.60mm x 0.80mm)", Stock 1=140000, Supplier 1=Digi-Key, Thickness (Max)="0.035\" (0.90mm)"
C16 C17 C18 C19 C20 C22 C25 C26 C31 C34 C35: "CAP CER 0.047UF 50V 10% X7R 0603", Capacitance=0.047µF, Manufacturer="Murata Electronics North America", Operating Temperature="-55°C ~ 125°C", Package / Case="0603 (1608 Metric)", Ratings=AEC-Q200, Temperature Coefficient=X7R, Tolerance=±10%, Voltage - Rated=50V, Applications=Automotive, Category=Capacitors, ComponentLink1Description=http://www.murata.com/products/catalog/pdf/c03e.pdf, ComponentLink1URL=http://www.murata.com/products/catalog/pdf/c03e.pdf, Features=-, Height - Seated (Max)=-, Lead Spacing=-, Lead Style=-, Manufacturer Part Number=GCM188R71H473KA55D, Mounting Type="Surface Mount, MLCC", Packaging="Cut Tape (CT)", Pricing 1="1=0.13, 10=0.09, 50=0.0518, 100=0.0428, 250=0.036, 500=0.03016, 1000=0.02475 (USD)", RoHS="RoHS Compliant", Size / Dimension="0.063\" L x 0.031\" W (1.60mm x 0.80mm)", Stock 1=2444374, Supplier 1=Digi-Key, Thickness (Max)="0.035\" (0.90mm)"
C21 C23 C32: "CAP CER 10000PF 50V 20% X7R 0603", Capacitance=10000pF, Manufacturer="Murata Electronics North America", Operating Temperature="-55°C ~ 125°C", Package / Case="0603 (1608 Metric)", Ratings=-, Temperature Coefficient=X7R, Tolerance=±20%, Voltage - Rated=50V, Applications="General Purpose", Category=Capacitors, ComponentLink1Description=http://search.murata.co.jp/Ceramy/image/img/A01X/G101/ENG/GRM188R71H103MA01-01.pdf, ComponentLink1URL=http://search.murata.co.jp/Ceramy/image/img/A01X/G101/ENG/GRM188R71H103MA01-01.pdf, Features=-, Height - Seated (Max)=-, Lead Spacing=-, Lead Style=-, Manufacturer Part Number=GRM188R71H103MA01D, Mounting Type="Surface Mount, MLCC", Packaging="Tape & Reel (TR)", Pricing 1="4000=0.00345, 8000=0.00315, 12000=0.003, 28000=0.00285, 100000=0.00206 (USD)", RoHS="RoHS Compliant", Size / Dimension="0.063\" L x 0.031\" W (1.60mm x 0.80mm)", Stock 1=24000, Supplier 1=Digi-Key, Thickness (Max)="0.035\" (0.90mm)"
C24: "CAP CER 1500PF 50V 5% NP0 0603", Capacitance=1500pF, Manufacturer="Murata Electronics North America", Operating Temperature="-55°C ~ 125°C", Package / Case="0603 (1608 Metric)", Ratings=-, Temperature Coefficient="C0G, NP0", Tolerance=±5%, Voltage - Rated=50V, Applications="General Purpose", Category=Capacitors, ComponentLink1Description=http://www.murata.com/products/catalog/pdf/c02e.pdf, ComponentLink1URL=http://www.murata.com/products/catalog/pdf/c02e.pdf, Features=-, Height - Seated (Max)=-, Lead Spacing=-, Lead Style=-, Manufacturer Part Number=GRM1885C1H152JA01D, Mounting Type="Surface Mount, MLCC", Packaging="Tape & Reel (TR)", Pricing 1="4000=0.01699, 8000=0.0158, 12000=0.01501, 28000=0.01422, 100000=0.01077 (USD)", RoHS="RoHS Compliant", Size / Dimension="0.063\" L x 0.031\" W (1.60mm x 0.80mm)", Stock 1=64000, Supplier 1=Digi-Key, Thickness (Max)="0.035\" (0.90mm)"
C27 C29: Package / Case="0603 (1608 Metric)", Applications="General Purpose", Mounting Type="Surface Mount, MLCC"
C28: "CAP CER 0.22UF 25V 10% X7R 0603", Capacitance=0.22µF, Manufacturer="Murata Electronics North America", Operating Temperature="-55°C ~ 125°C", Package / Case="0603 (1608 Metric)", Ratings=-, Temperature Coefficient=X7R, Tolerance=±10%, Voltage - Rated=25V, Applications="General Purpose", Category=Capacitors, ComponentLink1Description=http://www.murata.com/products/catalog/pdf/c02e.pdf, ComponentLink1URL=http://www.murata.com/products/catalog/pdf/c02e.pdf, Features=-, Height - Seated (Max)=-, Lead Spacing=-, Lead Style=-, Manufacturer Part Number=GRM188R71E224KA88D, Mounting Type="Surface Mount, MLCC", Packaging="Cut Tape (CT)", Pricing 1="1=0.14, 10=0.098, 50=0.0564, 100=0.0466, 250=0.0392, 500=0.03284, 1000=0.02695 (USD)", RoHS="RoHS Compliant", Size / Dimension="0.063\" L x 0.031\" W (1.60mm x 0.80mm)", Stock 1=27242, Supplier 1=Digi-Key, Supplier 2=Digi-Key, Thickness (Max)="0.035\" (0.90mm)"
C30: "CAP CER 33PF 50V NP0 0603", Capacitance=33pF, Manufacturer="Murata Electronics North America", Operating Temperature="-55°C ~ 125°C", Package / Case="0603 (1608 Metric)", Ratings=-, Supplier Part Number 1=490-1415-1-ND, Temperature Coefficient="C0G, NP0", Tolerance=±5%, Voltage - Rated=50V, Applications="General Purpose", Category=Capacitors, ComponentLink1Description=http://www.murata.com/~/media/webrenewal/support/library/catalog/products/capacitor/mlcc/c02e.pdf, ComponentLink1URL=http://www.murata.com/~/media/webrenewal/support/library/catalog/products/capacitor/mlcc/c02e.pdf, Features=-, Height - Seated (Max)=-, Lead Spacing=-, Lead Style=-, Manufacturer Part Number=GRM1885C1H330JA01D, Mounting Type="Surface Mount, MLCC", Packaging="Cut Tape (CT)", Pricing 1="1=0.1, 10=0.029, 50=0.0156, 100=0.0132, 250=0.0108, 500=0.00924, 1000=0.0072 (USD)", RoHS="RoHS Compliant", Size / Dimension="0.063\" L x 0.031\" W (1.60mm x 0.80mm)", Stock 1=394990, Supplier 1=Digi-Key, Thickness (Max)="0.035\" (0.90mm)"
C33: "CAP CER 100PF 50V 5% NP0 0603", Capacitance=100pF, Manufacturer="Murata Electronics North America", Operating Temperature="-55°C ~ 125°C", Package / Case="0603 (1608 Metric)", Ratings=-, Temperature Coefficient="C0G, NP0", Tolerance=±5%, Voltage - Rated=50V, Applications="RF, Microwave, High Frequency", Category=Capacitors, ComponentLink1Description=http://www.murata.com/products/catalog/pdf/c02e.pdf, ComponentLink1URL=http://www.murata.com/products/catalog/pdf/c02e.pdf, Features="High Q, Low Loss", Height - Seated (Max)=-, Lead Spacing=-, Lead Style=-, Manufacturer Part Number=GQM1885C1H101JB01D, Mounting Type="Surface Mount, MLCC", Packaging="Cut Tape (CT)", Pricing 1="1=0.78, 10=0.75, 50=0.448, 100=0.364, 250=0.3024, 500=0.2744, 1000=0.252 (USD)", RoHS="RoHS Compliant", Size / Dimension="0.063\" L x 0.031\" W (1.60mm x 0.80mm)", Stock 1=5529, Supplier 1=Digi-Key, Thickness (Max)="0.035\" (0.90mm)"
C36 C39 C40 C44: library part 251R14S120GV4T, "CAP CER 12PF 250V NP0 0603", Manufacturer="Johanson Technology Inc.", Operating Temperature="-55°C ~ 125°C", Package / Case="0603 (1608 Metric)", Ratings=-, Supplier Part Number 1=712-1313-2-ND, Temperature Coefficient="C0G, NP0", Tolerance=±2%, Voltage - Rated=250V, Applications="RF, Microwave, High Frequency", Capacitance=12pF, Category=Capacitors, ComponentLink1Description=http://www.johansontechnology.com/downloads/JTI-CAT-MLCC-HighQ.pdf, ComponentLink1URL=http://www.johansontechnology.com/downloads/JTI-CAT-MLCC-HighQ.pdf, Features="High Q, Low Loss", Height - Seated (Max)=-, Lead Spacing=-, Lead Style=-, Manufacturer Part Number=251R14S120GV4T, Mounting Type="Surface Mount, MLCC", Packaging="Tape & Reel (TR)", Part Status=Active, Pricing 1="4000=0.1071, 8000=0.1008, 12000=0.09765, 28000=0.0945, 100000=0.0819 (USD)", RoHS="RoHS Compliant", Size / Dimension="0.062\" L x 0.032\" W (1.57mm x 0.81mm)", Stock 1=32000, Supplier 1=Digi-Key, Thickness (Max)="0.035\" (0.89mm)"
C45: library part C1608C0G1H101J080AA, "CAP CER 100PF 50V C0G 0603", Manufacturer="TDK Corporation", Operating Temperature="-55°C ~ 125°C", Package / Case="0603 (1608 Metric)", Ratings=-, Supplier Part Number 1=445-1281-2-ND, Temperature Coefficient="C0G, NP0", Tolerance=±5%, Voltage - Rated=50V, Applications="General Purpose", Capacitance=100pF, Category=Capacitors, ComponentLink1Description=https://product.tdk.com/info/en/catalog/datasheets/mlcc_commercial_general_en.pdf, ComponentLink1URL=https://product.tdk.com/info/en/catalog/datasheets/mlcc_commercial_general_en.pdf, Failure Rate=-, Features="Low ESL", Height - Seated (Max)=-, Lead Spacing=-, Lead Style=-, Manufacturer Part Number=C1608C0G1H101J080AA, Mounting Type="Surface Mount, MLCC", Packaging="Tape & Reel (TR)", Part Status="Not For New Designs", Pricing 1="4000=0.01301, 8000=0.01188, 12000=0.01131, 28000=0.01075, 100000=0.00778 (USD)", RoHS="RoHS Compliant", Size / Dimension="0.063\" L x 0.031\" W (1.60mm x 0.80mm)", Stock 1=2140000, Supplier 1=Digi-Key, Thickness (Max)="0.037\" (0.95mm)"
C47: library part 251R14S0R5BV4T, "CAP CER 0.5PF 250V NP0 0603", Manufacturer="Johanson Technology Inc.", Operating Temperature="-55°C ~ 125°C", Package / Case="0603 (1608 Metric)", Ratings=-, Supplier Part Number 1=712-1168-2-ND, Temperature Coefficient="C0G, NP0", Tolerance=±0.1pF, Voltage - Rated=250V, Applications="RF, Microwave, High Frequency", Capacitance=0.5pF, Category=Capacitors, ComponentLink1Description=http://www.johansontechnology.com/downloads/JTI-CAT-MLCC-HighQ.pdf, ComponentLink1URL=http://www.johansontechnology.com/downloads/JTI-CAT-MLCC-HighQ.pdf, Features="High Q, Low Loss", Height - Seated (Max)=-, Lead Spacing=-, Lead Style=-, Manufacturer Part Number=251R14S0R5BV4T, Mounting Type="Surface Mount, MLCC", Packaging="Tape & Reel (TR)", Part Status=Active, Pricing 1="4000=0.048, 8000=0.0456, 12000=0.0432, 28000=0.0408, 100000=0.0324 (USD)", RoHS="RoHS Compliant", Size / Dimension="0.062\" L x 0.032\" W (1.57mm x 0.81mm)", Stock 1=76000, Supplier 1=Digi-Key, Thickness (Max)="0.035\" (0.89mm)"
C48: library part 251R14S1R3BV4T, "CAP CER 1.3PF 250V NP0 0603", Manufacturer="Johanson Technology Inc.", Operating Temperature="-55°C ~ 125°C", Package / Case="0603 (1608 Metric)", Ratings=-, Supplier Part Number 1=712-1326-2-ND, Temperature Coefficient="C0G, NP0", Tolerance=±0.1pF, Voltage - Rated=250V, Applications="RF, Microwave, High Frequency", Capacitance=1.3pF, Category=Capacitors, ComponentLink1Description=http://www.johansontechnology.com/downloads/JTI-CAT-MLCC-HighQ.pdf, ComponentLink1URL=http://www.johansontechnology.com/downloads/JTI-CAT-MLCC-HighQ.pdf, Features="High Q, Low Loss", Height - Seated (Max)=-, Lead Spacing=-, Lead Style=-, Manufacturer Part Number=251R14S1R3BV4T, Mounting Type="Surface Mount, MLCC", Packaging="Tape & Reel (TR)", Part Status=Active, Pricing 1="4000=0.048, 8000=0.0456, 12000=0.0432, 28000=0.0408, 100000=0.0324 (USD)", RoHS="RoHS Compliant", Size / Dimension="0.062\" L x 0.032\" W (1.57mm x 0.81mm)", Stock 1=4000, Supplier 1=Digi-Key, Thickness (Max)="0.035\" (0.89mm)"
C49: library part 251R14S0R8BV4T, "CAP CER 0.8PF 250V NP0 0603", Manufacturer="Johanson Technology Inc.", Operating Temperature="-55°C ~ 125°C", Package / Case="0603 (1608 Metric)", Ratings=-, Supplier Part Number 1=712-1305-2-ND, Temperature Coefficient="C0G, NP0", Tolerance=±0.1pF, Voltage - Rated=250V, Applications="RF, Microwave, High Frequency", Capacitance=0.8pF, Category=Capacitors, ComponentLink1Description=http://www.johansontechnology.com/downloads/JTI-CAT-MLCC-HighQ.pdf, ComponentLink1URL=http://www.johansontechnology.com/downloads/JTI-CAT-MLCC-HighQ.pdf, Features="High Q, Low Loss", Height - Seated (Max)=-, Lead Spacing=-, Lead Style=-, Manufacturer Part Number=251R14S0R8BV4T, Mounting Type="Surface Mount, MLCC", Packaging="Tape & Reel (TR)", Part Status=Active, Pricing 1="4000=0.048, 8000=0.0456, 12000=0.0432, 28000=0.0408, 100000=0.0324 (USD)", RoHS="RoHS Compliant", Size / Dimension="0.062\" L x 0.032\" W (1.57mm x 0.81mm)", Stock 1=104000, Supplier 1=Digi-Key, Thickness (Max)="0.035\" (0.89mm)"
C57 C58: library part EMK107BC6106MA-T, "CAP CER 10uF", Capacitance=10µF, Manufacturer="Taiyo Yuden", Operating Temperature="-55°C ~ 105°C", Package / Case="0603 (1608 Metric)", Ratings=-, Supplier Part Number 1=587-4867-2-ND, Temperature Coefficient=X6S, Tolerance=±20%, Voltage - Rated=16V, Applications="SMPS Filtering", Category=Capacitors, ComponentLink1Description=http://www.yuden.co.jp/productdata/catalog/en/mlcc06_e.pdf, ComponentLink1URL=http://www.yuden.co.jp/productdata/catalog/en/mlcc06_e.pdf, Failure Rate=-, Features=-, Height - Seated (Max)=-, Lead Spacing=-, Lead Style=-, Manufacturer Part Number=EMK107BC6106MA-T, Mounting Type="Surface Mount, MLCC", Packaging="Tape & Reel (TR)", Part Status=Active, Pricing 1="4000=0.08689, 8000=0.08178, 12000=0.07922, 28000=0.07667, 100000=0.06798 (USD)", RoHS="RoHS Compliant", Size / Dimension="0.063\" L x 0.031\" W (1.60mm x 0.80mm)", Stock 1=0, Supplier 1=Digi-Key, Thickness (Max)="0.039\" (1.00mm)"
CONN1: "CONN USB MICRO B RECPT SMT R/A", Current Rating="1.8A per Contact", Insulation Color=Black, Manufacturer="Amphenol FCI", Material Flammability Rating="UL94 V-0", Operating Temperature="-30°C ~ 80°C", Supplier Part Number 1=609-4616-2-ND, Voltage - Rated=100VAC, Category="Connectors, Interconnects", ComponentLink1Description=http://portal.fciconnect.com/Comergent//fci/drawing/10118193.pdf, ComponentLink1URL=http://portal.fciconnect.com/Comergent//fci/drawing/10118193.pdf, Connector Type="USB - micro B", Contact Finish=Gold, Features="Solder Retention", Gender=Receptacle, Ingress Protection=-, Manufacturer Part Number=10118193-0001LF, Mating Cycles=10000, Mounting Feature=Horizontal, Mounting Type="Surface Mount, Right Angle; Through Hole", Number of Contacts=5, Number of Ports=1, Packaging="Tape & Reel (TR)", Part Status=Active, Pricing 1="1200=0.19845, 2400=0.18144, 6000=0.1701, 8400=0.15876, 12000=0.15309, 30000=0.15082, 60000=0.14742 (USD)", RoHS="RoHS Compliant", Shell/Shielding Material="Steel, Stainless", Shielding=Shielded, Specifications="USB 2.0", Stock 1=88800, Supplier 1=Digi-Key, Termination=Solder
D1 D2: "LED ORANGE CLEAR 0603 SMD", Color=Orange, Current - Test=20mA, Lens Color=Colorless, Manufacturer="Lite-On Inc.", Millicandela Rating=90mcd, Package / Case="0603 (1608 Metric)", Supplier Part Number 1=160-1445-2-ND, Voltage - Forward (Vf) (Typ)=2V, Category=Optoelectronics, ComponentLink1Description=http://optoelectronics.liteon.com/upload/download/DS22-2000-222/S_110_LTST-C191KFKT.pdf, ComponentLink1URL=http://optoelectronics.liteon.com/upload/download/DS22-2000-222/S_110_LTST-C191KFKT.pdf, Features=-, Height (Max)=0.55mm, Lens Style/Size="Rectangle with Flat Top, 1.10mm x 0.80mm", Lens Transparency=Clear, Manufacturer Part Number=LTST-C191KFKT, Mounting Type="Surface Mount", Packaging="Tape & Reel (TR)", Part Status=Active, Pricing 1="5000=0.0376, 10000=0.03384, 25000=0.03008, 50000=0.02726, 125000=0.02538 (USD)", RoHS="RoHS Compliant", Size / Dimension="1.60mm L x 0.80mm W", Stock 1=160000, Supplier 1=Digi-Key, Viewing Angle=130°, Wavelength - Dominant=605nm, Wavelength - Peak=611nm
D3: "LED RED/GREEN/BLUE PLCC4 SMD", Color="Red, Green, Blue (RGB)", Current - Test=20mA, Luminous Flux @ Current - Test=-, Manufacturer="Cree Inc", Millicandela Rating="675mcd Red, 1055mcd Green, 337mcd Blue", Package / Case=4-PLCC, Voltage - Forward (Vf) (Typ)="2V Red, 3.2V Green, 3.2V Blue", Category=Optoelectronics, ComponentLink1Description=http://www.cree.com/~/media/Files/Cree/LED%20Components%20and%20Modules/HB/Data%20Sheets/CLV1AFKB(874).pdf, ComponentLink1URL=http://www.cree.com/~/media/Files/Cree/LED%20Components%20and%20Modules/HB/Data%20Sheets/CLV1AFKB(874).pdf, Height=2.10mm, Lens Style/Size="Round with Flat Top, 2.2mm", Lens Type="Diffused, White", Manufacturer Part Number=CLV1A-FKB-CJ1M1F1BB7R4S3, Mounting Type="Surface Mount", Packaging="Tape & Reel (TR)", Pricing 1="2000=0.354, 50000=0.329, 100000=0.307 (USD)", RoHS="RoHS Compliant", Size / Dimension="3.20mm L x 2.80mm W", Stock 1=254000, Supplier 1=Digi-Key, Viewing Angle=120°, Wavelength - Dominant="621.5nm, 530nm, 472.5nm", Wavelength - Peak="630nm, 527nm, 470nm"
FB1 FB2: "FERRITE CHIP 220 OHM 200MA 0603", Current Rating=200mA, DC Resistance (DCR)="450 mOhm Max", Impedance @ Frequency="220 Ohm @ 100MHz", Manufacturer="Murata Electronics North America", Package / Case="0603 (1608 Metric)", Category=Filters, ComponentLink1Description=http://search.murata.co.jp/Ceramy/image/img/PDF/ENG/L0110S0100BLM18B.pdf, ComponentLink1URL=http://search.murata.co.jp/Ceramy/image/img/PDF/ENG/L0110S0100BLM18B.pdf, Filter Type="Differential Mode - Single", Height (Max)="0.037\" (0.95mm)", Manufacturer Part Number=BLM18BD221SN1D, Mounting Type="Surface Mount", Packaging="Cut Tape (CT)", Pricing 1="1=0.1, 10=0.087, 50=0.0712, 100=0.0523, 250=0.038, 500=0.03484, 1000=0.0301 (USD)", RoHS="RoHS Compliant", Size / Dimension="0.063\" L x 0.031\" W (1.60mm x 0.80mm)", Stock 1=35645, Supplier 1=Digi-Key
J1: "CONN HEADER 2POS 1.25MM VERT SMD", Color=Natural, Manufacturer="Molex Inc", Supplier Part Number 1=WM7606CT-ND, Category="Connectors, Interconnects", ComponentLink1Description=http://www.molex.com/pdm_docs/sd/533980271_sd.pdf, ComponentLink1URL=http://www.molex.com/pdm_docs/sd/533980271_sd.pdf, Connector Style=-, Connector Type="Header, Male Blades", Features=-, Manufacturer Part Number=0533980271, Mounting Type="Surface Mount", Number of Positions=2, Packaging="Cut Tape (CT)", Pitch="0.049\" (1.25mm)", Pricing 1="1=1.4, 10=1.091, 25=1.0168, 50=0.923, 100=0.8323, 250=0.7014, 500=0.66448 (USD)", RoHS="RoHS Compliant", Stock 1=14126, Supplier 1=Digi-Key, Termination=Solder, Wire Gauge=-
L1: "FIXED IND 10NH 400MA 300 MOHM", Current - Saturation=-, Current Rating=400mA, DC Resistance (DCR)="300 mOhm Max", Frequency - Self Resonant=3.5GHz, Frequency - Test=100MHz, Inductance=10nH, Manufacturer="Murata Electronics North America", Operating Temperature="-40°C ~ 85°C", Package / Case="0603 (1608 Metric)", Q @ Freq="12 @ 100MHz", Supplier Part Number 1=490-6574-1-ND, Tolerance=±5%, Category="Inductors, Coils, Chokes", ComponentLink1Description=http://search.murata.co.jp/Ceramy/image/img/PDF/ENG/L0075S0083LQG18H.pdf, ComponentLink1URL=http://search.murata.co.jp/Ceramy/image/img/PDF/ENG/L0075S0083LQG18H.pdf, Height - Seated (Max)="0.037\" (0.95mm)", Manufacturer Part Number=LQG18HN10NJ00D, Material - Core=Air, Mounting Type="Surface Mount", Packaging="Cut Tape (CT)", Pricing 1="1=0.21, 10=0.187, 25=0.168, 50=0.1454, 100=0.1306, 250=0.12124, 500=0.1119, 750=0.10631, 1000=0.09698 (USD)", Ratings=-, RoHS="RoHS Compliant", Shielding=Unshielded, Size / Dimension="0.063\" L x 0.031\" W (1.60mm x 0.80mm)", Stock 1=14010, Supplier 1=Digi-Key, Type=Multilayer
L2: library part LQG18HN3N3S00D, "FIXED IND 3.3NH 500MA 150 MOHM", Current - Saturation=-, Current Rating=500mA, DC Resistance (DCR)="150 mOhm Max", Frequency - Self Resonant=6GHz, Frequency - Test=100MHz, Manufacturer="Murata Electronics North America", Operating Temperature="-40°C ~ 85°C", Package / Case="0603 (1608 Metric)", Q @ Freq="12 @ 100MHz", Supplier Part Number 1=490-1104-2-ND, Tolerance=±0.3nH, Category="Inductors, Coils, Chokes", ComponentLink1Description=http://search.murata.co.jp/Ceramy/image/img/P02/JELF243B-0002.pdf, ComponentLink1URL=http://search.murata.co.jp/Ceramy/image/img/P02/JELF243B-0002.pdf, Height - Seated (Max)="0.037\" (0.95mm)", Inductance=3.3nH, Manufacturer Part Number=LQG18HN3N3S00D, Material - Core=Air, Mounting Type="Surface Mount", Packaging="Tape & Reel (TR)", Part Status=Active, Pricing 1="4000=0.06714, 8000=0.06341, 12000=0.05968, 28000=0.05782, 100000=0.05409 (USD)", Ratings=-, RoHS="RoHS Compliant", Shielding=Unshielded, Size / Dimension="0.063\" L x 0.031\" W (1.60mm x 0.80mm)", Stock 1=32000, Supplier 1=Digi-Key, Supplier Device Package="0603 (1608 Metric)", Type=Multilayer
L3: library part L-14C1N8SV4T, "FIXED IND 1.8NH 300MA 100 MOHM", Current - Saturation=-, Current Rating=300mA, DC Resistance (DCR)="100 mOhm Max", Frequency - Self Resonant=23GHz, Frequency - Test=100MHz, Manufacturer="Johanson Technology Inc.", Operating Temperature="-40°C ~ 100°C", Package / Case="0603 (1608 Metric)", Q @ Freq="12 @ 100MHz", Supplier Part Number 1=712-1426-2-ND, Tolerance=±0.3nH, Category="Inductors, Coils, Chokes", ComponentLink1Description=http://www.johansontechnology.com/downloads/jti-cat-rf-ind.pdf, ComponentLink1URL=http://www.johansontechnology.com/downloads/jti-cat-rf-ind.pdf, Height - Seated (Max)="0.037\" (0.95mm)", Inductance=1.8nH, Manufacturer Part Number=L-14C1N8SV4T, Material - Core=Ceramic, Mounting Type="Surface Mount", Packaging="Tape & Reel (TR)", Part Status=Active, Pricing 1="4000=0.02142, 8000=0.02023, 12000=0.01904, 28000=0.01845, 100000=0.01726 (USD)", Ratings=-, RoHS="RoHS Compliant", Shielding=Unshielded, Size / Dimension="0.063\" L x 0.031\" W (1.60mm x 0.80mm)", Stock 1=16000, Supplier 1=Digi-Key, Supplier Device Package="0603 (1608 Metric)", Type=Multilayer
P1: "CONN HDR 1.27MM VERT AU 10POS", Color=Black, Manufacturer="Harwin Inc", Category="Connectors, Interconnects", ComponentLink1Description=http://harwin.com/includes/pdfs/M50-350.pdf, ComponentLink1URL=http://harwin.com/includes/pdfs/M50-350.pdf, Connector Type=Unshrouded, Contact Finish=Gold, Contact Finish Thickness="5.9µin (0.15µm)", Contact Mating Length="0.118\" (3.00mm)", Features=-, Height Stacking (Mating)=-, Manufacturer Part Number=M50-3500542, Molding Height Above Board="0.039\" (1.00mm)", Mounting Type="Through Hole", Number of Positions=10, Number of Positions Loaded=All, Number of Rows=2, Packaging=Bulk, Pitch="0.050\" (1.27mm)", Pricing 1="1=1.16, 10=1.017, 25=0.9576, 50=0.9178, 100=0.8778, 250=0.798, 500=0.7182, 1000=0.6384, 2500=0.57855 (USD)", RoHS="RoHS Compliant", Row Spacing="0.050\" (1.27mm)", Stock 1=16006, Supplier 1=Digi-Key, Termination=Solder
P2: "Header, 7-Pin", LatestRevisionDate=17-Jul-2002, LatestRevisionNote="Re-released for DXP Platform.", Publisher="Altium Limited"
P3: "Header, 3-Pin", LatestRevisionDate=17-Jul-2002, LatestRevisionNote="Re-released for DXP Platform.", Publisher="Altium Limited"
R1: library part RC0603FR-0710KL, "RES 10.0K OHM 1/10W 1% 0603 SMD", Manufacturer=Yageo, Package / Case="0603 (1608 Metric)", Power (Watts)="0.1W, 1/10W", Resistance (Ohms)=10k, Supplier Device Package=0603, Temperature Coefficient=±100ppm/°C, Tolerance=±1%, Category=Resistors, ComponentLink1Description=http://www.yageo.com/documents/recent/PYu-RC0603_51_RoHS_L_4.pdf, ComponentLink1URL=http://www.yageo.com/documents/recent/PYu-RC0603_51_RoHS_L_4.pdf, Composition="Thick Film", Features=-, Height="0.022\" (0.55mm)", Manufacturer Part Number=RC0603FR-0710KL, Number of Terminations=2, Packaging="Tape & Reel (TR)", Pricing 1="5000=0.00171, 10000=0.00149, 25000=0.00131, 50000=0.0012, 125000=0.00117 (USD)", RoHS="RoHS Compliant", Size / Dimension="0.063\" L x 0.031\" W (1.60mm x 0.80mm)", Stock 1=11245000, Supplier 1=Digi-Key